# Altium PCB Liquid Tremolo.PcbDoc
Units mm, origin at the board's own origin, x right, y up, seen from the top; angles counter-clockwise.
Board outline 52.07 x 102.87 mm, 2 copper layers (Top Layer, Bottom Layer); 58 components, 47 nets, 186 pads, 60 vias.
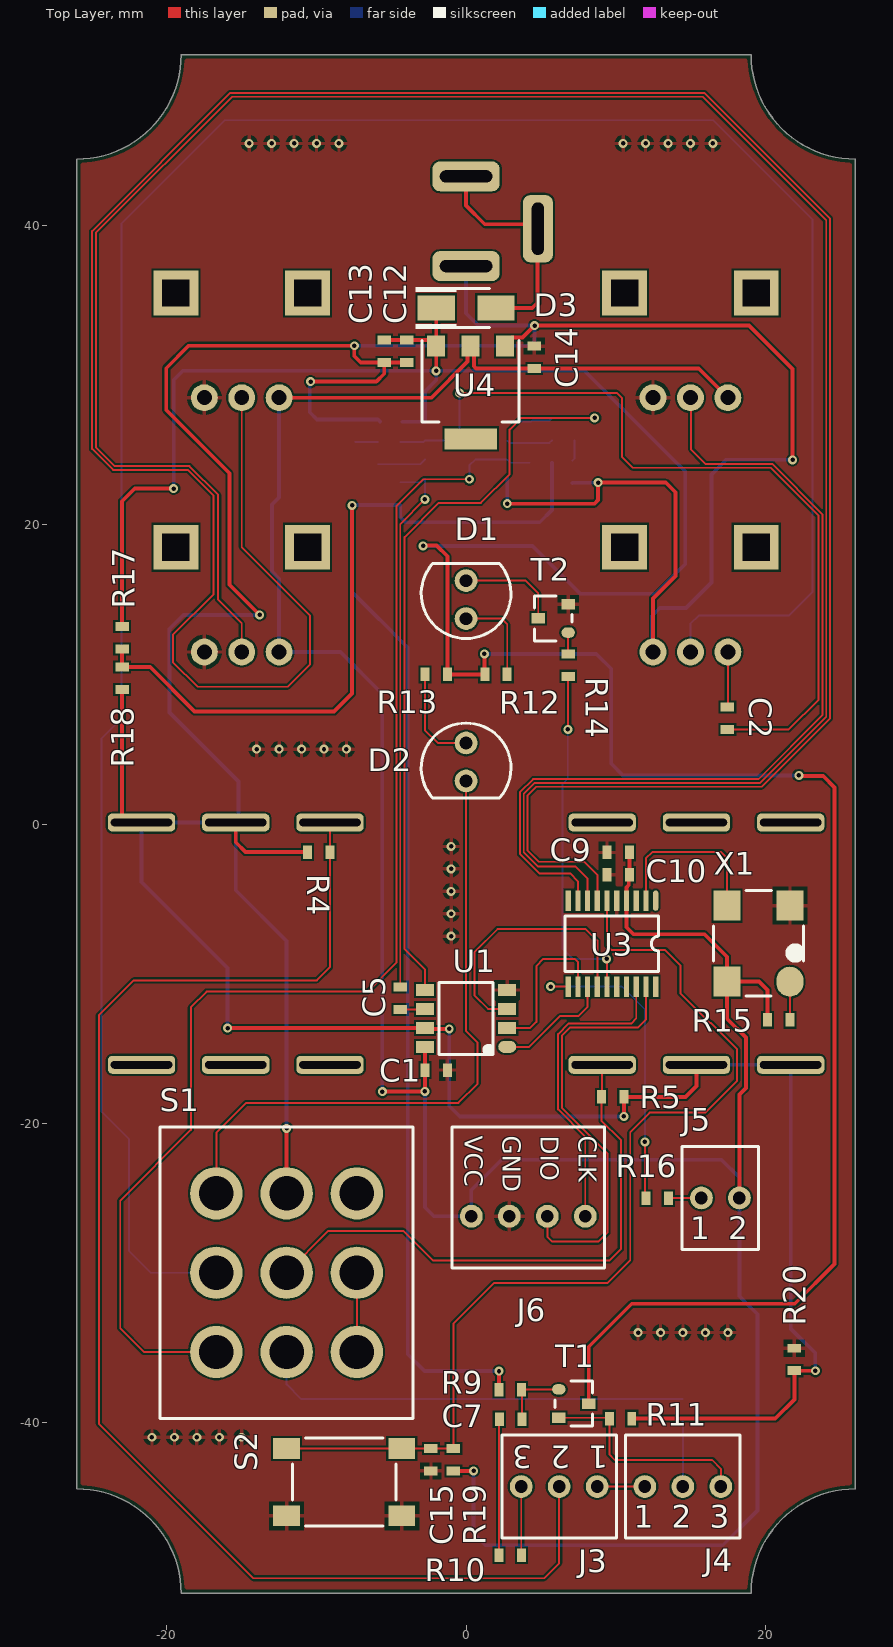
[diagram p0: Top Layer view]
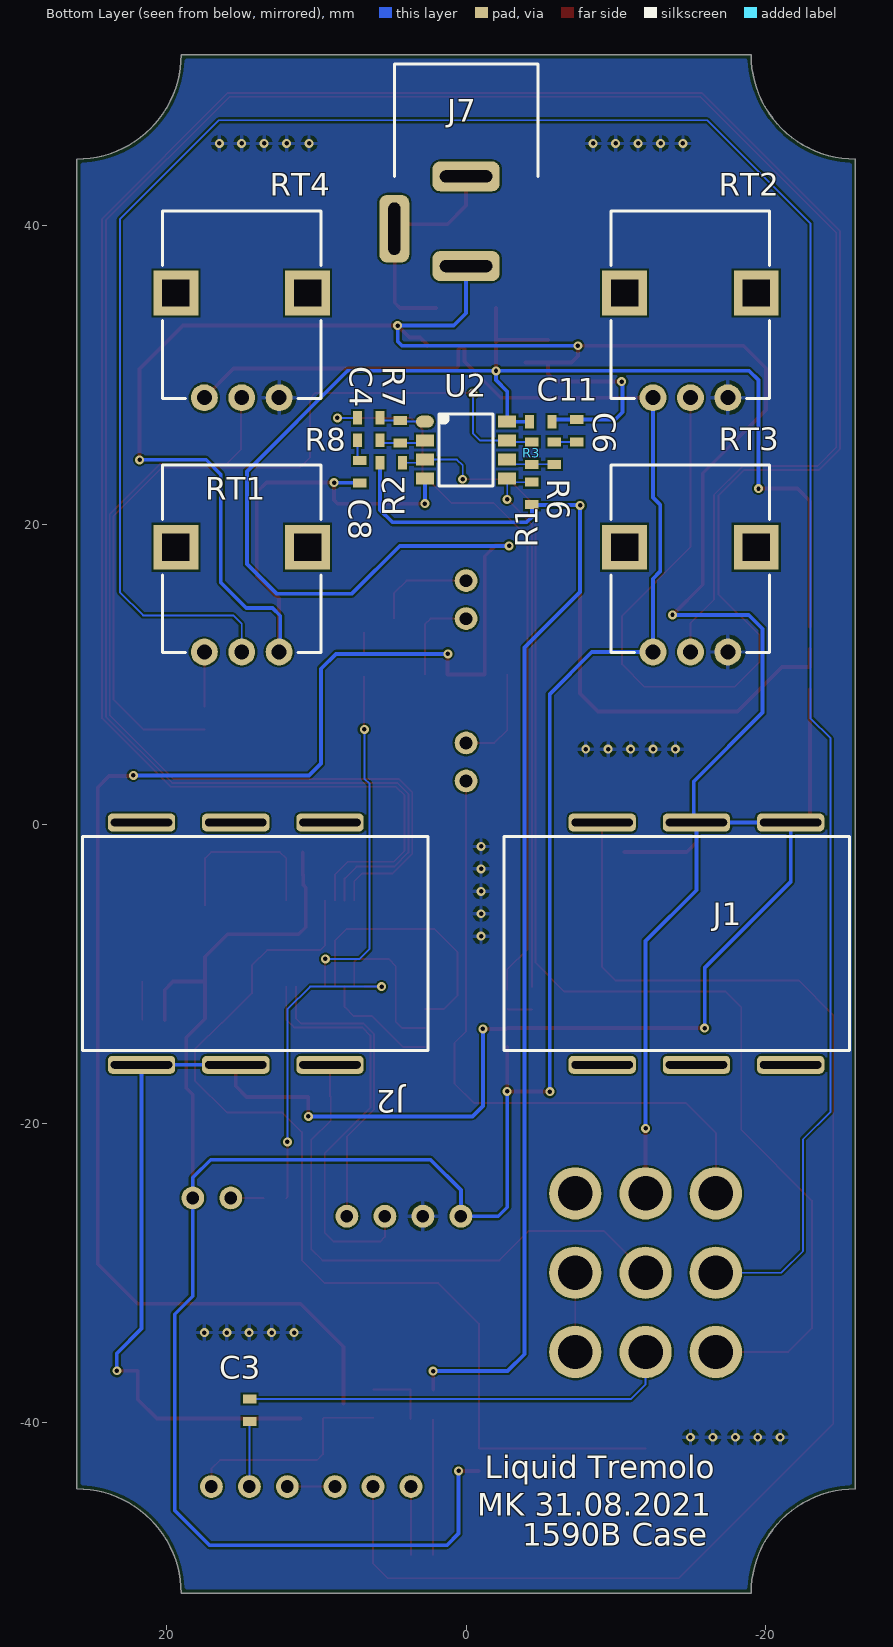
[diagram p1: Bottom Layer view, seen from below]
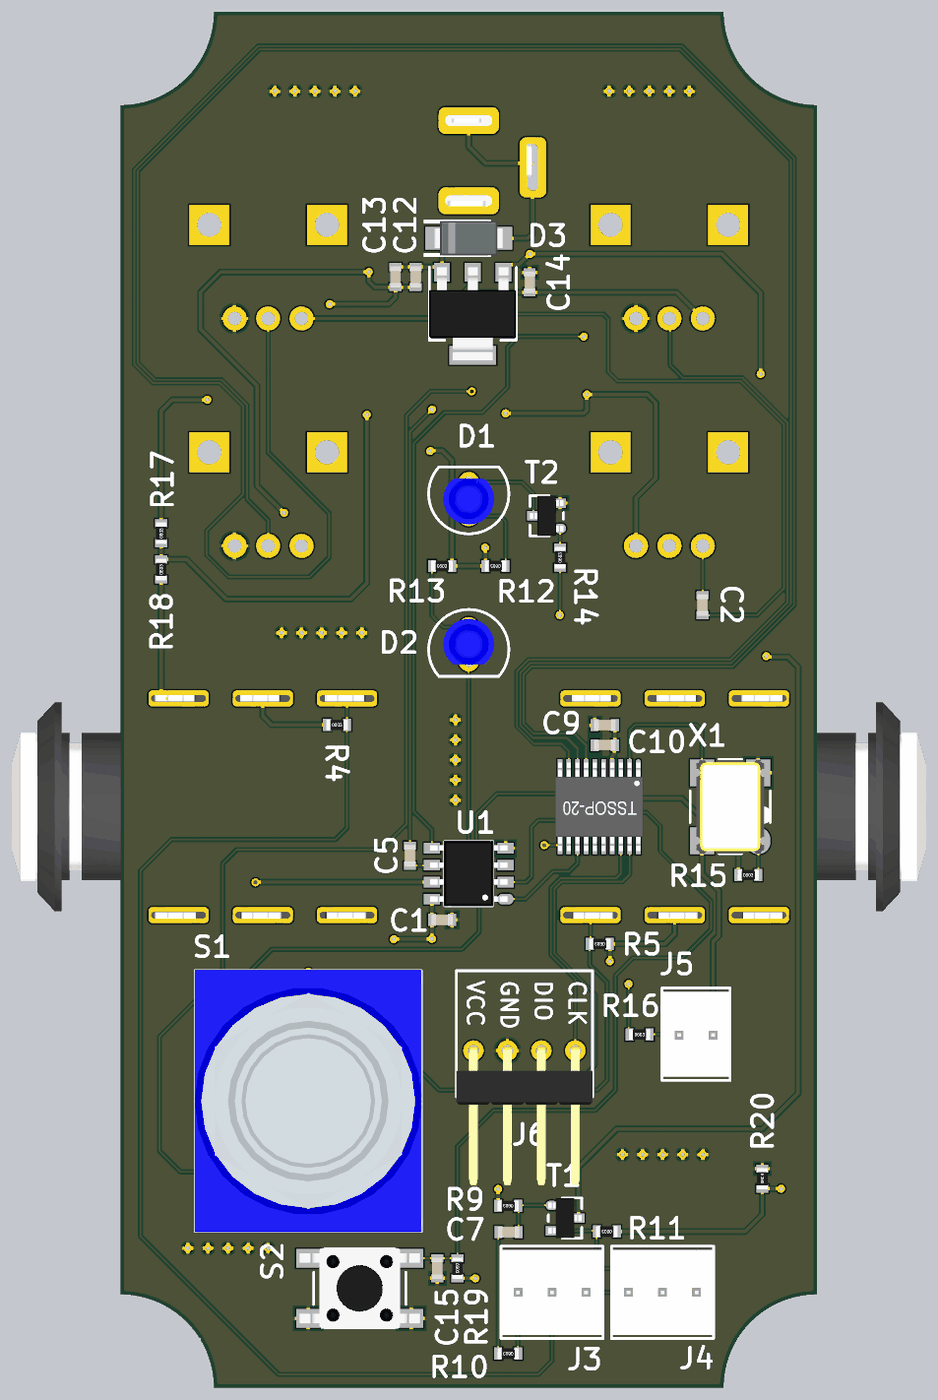
[diagram p2: 3D render of the assembled board from above, using the file's embedded part models]
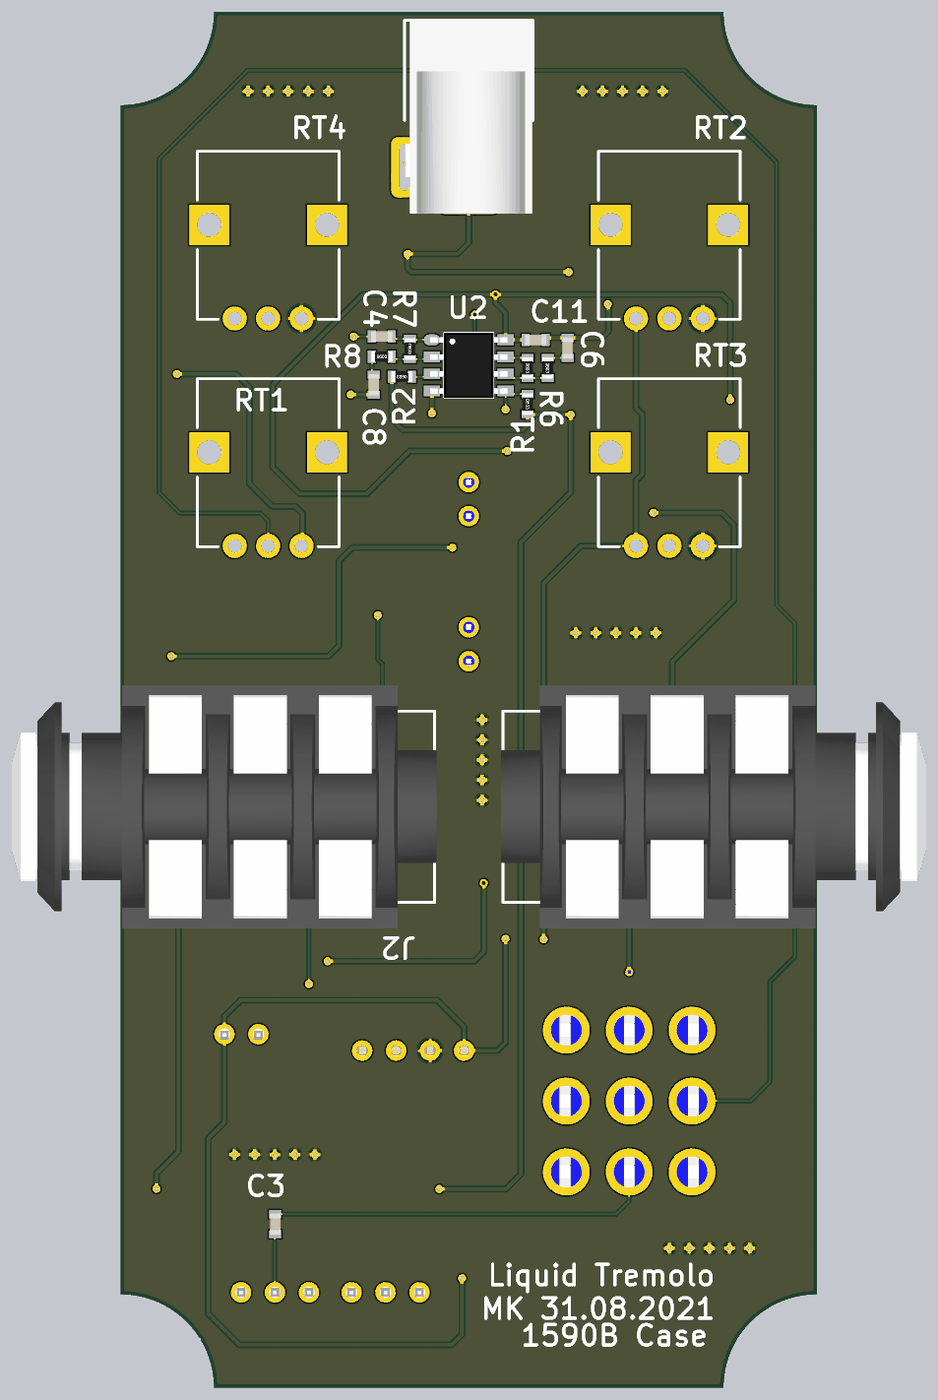
[diagram p3: 3D render of the assembled board from below, using the file's embedded part models]

## Layer stack, top to bottom
Top Solder: solder mask 0.0102, Solder Resist, Dk 3.5
Top Layer: signal copper 0.0356
Dielectric 1: dielectric 0.32, FR-4, Dk 4.8
Bottom Layer: signal copper 0.0356
Bottom Solder: solder mask 0.0102, Solder Resist, Dk 3.5

## Board outline
-26.035,-44.45 -26.035,44.45 ccw(c-26.035,51.435) -19.05,51.435 19.05,51.435 ccw(c26.035,51.435) 26.035,44.45 26.035,-44.45 ccw(c26.035,-51.435) 19.05,-51.435 -19.05,-51.435 ccw(c-26.035,-51.435)

## Design rules (kind name [scope] priority, off if disabled: settings)
BoardOutlineClearance [All] p1: gap=0.254 ignorepadtopadclearanceinfootprint=FALSE
Clearance [All] p1: gap=0.127 ignorepadtopadclearanceinfootprint=FALSE except(0.2: Arc-SMDPad Track-SMDPad; 0.254: Arc-Via Track-Via Via-Via; 0.33: Arc-THPad Track-THPad; 0.5: THPad-THPad)
Height [All] p1: minheight=0 maxheight=50 prefheight=12.7
HoleSize [All] p1: absolutevalues=TRUE maxlimit=6.3 minlimit=0.3 maxpercent=80.000 minpercent=20.000
HoleToHoleClearance [All] p1: gap=0.5 allowstackedmicrovias=TRUE
MinimumSolderMaskSliver [All] p1: minsoldermaskwidth=0.05
PolygonConnect [All] p1: connectstyle=Relief reliefconductorwidth=0.254 reliefentries=4 polygonreliefangle="90 Angle" airgapwidth=0.254
RoutingVias [All] p1: holewidth=0.3 width=0.6 viastyle="Through Hole" minholewidth=0.3 minwidth=0.6 maxholewidth=0.3 maxwidth=0.6
SilkToSilkClearance [All] p1: silktosilkclearance=0.1
SilkToSolderMaskClearance [IsPad] p1: minsilkscreentomaskgap=0.1 clearancetoexposedcopper=TRUE
SolderMaskExpansion [All] p1: expansion=0.102 istentingtop=FALSE
Width Power [InNet('+3.3V') or InNet('+4.5V') or InNet('+9V') or InNet('GND') or InNet('DGND') or InNet('NetD3_1')] p1: maxlimit=0.254 minlimit=0.254 preferedwidth=0.254
Width [All] p2: maxlimit=0.127 minlimit=0.127 preferedwidth=0.127
24 further rules are at their usual default settings.

## Components (designator, comment, footprint, x,y, rotation, side; value= is the part's Value field where it differs from the comment)
C1 "1μ 16V" "CAPACITOR 0603" -2,-16.45 r0 top
C2 "470n 16V" "CAPACITOR 0603" 17.475,7.075 r90 top
C3 "470n 16V" "CAPACITOR 0603" 14.475,-39.2 r90 bottom
C4 "470n 16V" "CAPACITOR 0603" 6.5,27.15 r0 bottom
C5 "470n 16V" "CAPACITOR 0603" -4.4,-11.65 r90 top
C6 "1μ 16V" "CAPACITOR 0603" -7.4,26.3 r270 bottom
C7 "47n 16V" "CAPACITOR 0603" 2.975,-39.8 r0 top
C8 "1μ 16V" "CAPACITOR 0603" 7.1,23.55 r90 bottom
C9 "470n 16V" "CAPACITOR 0603" 10.175,-1.9 r0 top
C10 "1μ 16V" "CAPACITOR 0603" 10.175,-3.4 r0 top
C11 "22μ 10V" "CAPACITOR 0603" -5,26.9 r0 bottom
C12 "22μ 10V" "CAPACITOR 0603" -3.975,31.6 r90 top
C13 "22μ 10V" "CAPACITOR 0603" -5.475,31.6 r90 top
C14 "22μ 10V" "CAPACITOR 0603" 4.55,31.2 r270 top
C15 "470n 16V" "CAPACITOR 0603" -2.35,-42.5 r90 top
D1 "Blue 3mm" "LED 3MM BLUE" 0,15 r270 top
D2 "Red 3mm" "LED 3MM BLUE" 0,4.15 r90 top locked
D3 "SS24A" SS24A 0,34.5 r180 top
J1 "PJ-609K" "HOOYA PJ-609K" -15.4,-8 r0 bottom locked
J2 "PJ-609K" "HOOYA PJ-609K" 15.4,-8 r180 bottom locked
J3 "HX25411-3A" HX25411-3A 6.225,-44.3 r180 top
J4 "HX25411-3A" HX25411-3A 14.49,-44.3 r0 top
J5 "HX25411-2A" HX25411-2A 17,-25 r0 top
J6 "W-2510R04P-0000" W-2510R04P-0000 4.16,-26.225 r180 top
J7 "DC-005 2.0" "DC-005 2.0" 0,50.8 r270 bottom
R1 "470k" "RESISTOR 0603" -4.4,22.1 r270 bottom
R2 "470k" "RESISTOR 0603" 5,24.15 r0 bottom
R3 "10k" "RESISTOR 0603" -4.4,24.8 r270 bottom
R4 "1M" "RESISTOR 0603" -9.85,-1.875 r0 top
R5 "1M" "RESISTOR 0603" 9.8,-18.25 r180 top
R6 "10k" "RESISTOR 0603" -5.9,24.8 r270 bottom
R7 "10k" "RESISTOR 0603" 4.4,26.225 r270 bottom
R8 "10k" "RESISTOR 0603" 6.5,25.65 r180 bottom
R9 "470k" "RESISTOR 0603" 2.95,-37.825 r180 top
R10 "1k" "RESISTOR 0603" 2.95,-48.875 r180 top
R11 "10k" "RESISTOR 0603" 10.325,-39.75 r180 top
R12 "100Ω" "RESISTOR 0603" 2,10 r180 top
R13 "1k" "RESISTOR 0603" -2,10 r0 top
R14 "1k" "RESISTOR 0603" 6.825,10.625 r90 top
R15 "10k" "RESISTOR 0603" 20.9,-13.1 r0 top
R16 "10k" "RESISTOR 0603" 12.775,-25.025 r0 top
R17 "10k" "RESISTOR 0603" -23,12.45 r90 top
R18 "10k" "RESISTOR 0603" -23,9.74 r90 top
R19 "10k" "RESISTOR 0603" -0.85,-42.5 r270 top
R20 "0Ω" "RESISTOR 0603" 21.95,-35.8 r90 top
RT1 "10k" RK09D1130C2P 15,18.5 r180 bottom locked
RT2 "10k" RK09D1130C2P -15,35.5 r180 bottom locked
RT3 "10k" RK09D1130C2P -15,18.5 r180 bottom locked
RT4 "10k" RK09D1130C2P 15,35.5 r180 bottom locked
S1 "3PDT" 3PDT -12,-30 r90 top locked
S2 "K2-1102SP-C4SC-04" K2-1102SP-C4SC-04 -8.15,-44 r0 top
T1 "2SC1815" 2SC1815 7.2,-38.75 r270 top
T2 "2SC1815" 2SC1815 5.825,13.75 r90 top
U1 "MCP41010T-I/SN" MCP41010 0,-13 r180 top
U2 "JRC4558D" JRC4558 0,25 r180 bottom
U3 "STM32G030F6P6TR" STM32G030F6P6TR 9.75,-8 r180 top
U4 "SC1117-3.3V" SC1117-3.3V 0.3,28.85 r180 top
X1 "S7D32.768KB20F30T" S7D32.768KB20F30T 19.55,-8 r90 top

## Footprints (in the part's own frame and the unit in brackets; to place one, negate y for a bottom-side part, rotate by r counter-clockwise, add the part's x,y. Pads: shape width x height; smd on the part's side, far side on the other; paste and mask are expansions set on the pad)
2SC1815 [mm]
  oval 0.7x0.9 smd: 1(-0.95,-1)
  rect 0.7x0.9 smd: 2(0.95,-1) 3(0,1)
  silkscreen extent -1.5,-1.25 1.5,1.25, body extent -1.5,-1.25 1.5,1.25, height 1.1
3PDT [mm]
  round 3.5 hole 2.3: 1(-5.3,4.7) 2(-5.3,0) 3(-5.3,-4.7) 4(0,4.7) 5(0,0) 6(0,-4.7) 7(5.3,4.7) 8(5.3,0) 9(5.3,-4.7)
  silkscreen extent -9.75,-8.45 9.75,8.45, body extent -9.8,-8.5 9.8,8.5, height 39.5
"CAPACITOR 0603" [mm]
  rect 0.6x0.9 smd: 1(-0.75,0) 2(0.75,0)
  body extent -0.8,-0.4 0.8,0.4, height 0.8
"DC-005 2.0" [mm]
  rrect50% 4.5x2 hole 0.8 slot 3.5 at 0 deg: 2(11,-4.8)
  rrect50% 2x4.5 hole 0.8 slot 3.5 at 90 deg: 3(7.5,0) 4(13.5,0)
  silkscreen extent 0,-4.8 7.5,4.8, body extent 0,-4.74 14.48,4.74, height 11.18
"HOOYA PJ-609K" [mm]
  rrect50% 4.5x1.2 hole 0.5 slot 4.1 at 0 deg: 2(-6.3,-8.1) 3(-6.3,8.1) 4(0,-8.1) 5(0,8.1) 6(6.3,-8.1) 7(6.3,8.1)
  silkscreen extent -10.25,-7.15 12.85,7.15, body extent -18.79,-9.1 13,9.1, height 17.8
HX25411-2A [mil]
  round 60 hole 33.46: 1(-50,0) 2(50,0)
  silkscreen extent -100,-136 100,136, body extent -100,-125 100,125, height 453
HX25411-3A [mil]
  round 60 hole 33.46: 1(-100,0) 2(0,0) 3(100,0)
  silkscreen extent -150,-136 150,136, body extent -150,-125 150,125, height 453
JRC4558 [mm]
  oval 1.2x0.8 smd: 1(-2.75,1.905)
  rect 1.2x0.8 smd: 2(-2.75,0.635) 3(-2.75,-0.635) 4(-2.75,-1.905) 5(2.75,-1.905) 6(2.75,-0.635) 7(2.75,0.635) 8(2.75,1.905)
  silkscreen extent -1.8,-2.4 1.8,2.4, body extent -2.89,-2.45 2.89,2.45, height 1.45
K2-1102SP-C4SC-04 [mm]
  rect 1.8x1.4 smd: 1(-3.85,-2.25) 2(3.85,-2.25) 3(3.85,2.25) 4(-3.85,2.25)
  silkscreen extent -3.45,-2.95 3.45,2.95, body extent -4.5,-3 4.5,3, height 5
"LED 3MM BLUE" [mil]
  round 60 hole 33.46: 1(-50,0) 2(50,0)
  silkscreen extent -94,-118 102,118, body extent -60,-75 75,75, height 379
MCP41010 [mm]
  oval 1.2x0.8 smd: 1(-2.75,1.905)
  rect 1.2x0.8 smd: 2(-2.75,0.635) 3(-2.75,-0.635) 4(-2.75,-1.905) 5(2.75,-1.905) 6(2.75,-0.635) 7(2.75,0.635) 8(2.75,1.905)
  silkscreen extent -1.8,-2.4 1.8,2.4, body extent -2.89,-2.45 2.89,2.45, height 1.45
"RESISTOR 0603" [mm]
  rect 0.6x0.9 smd: 1(-0.75,0) 2(0.75,0)
  body extent -0.8,-0.4 0.8,0.4, height 0.45
RK09D1130C2P [mm]
  round 1.8 hole 1: 1(-2.5,-7) 2(0,-7) 3(2.5,-7)
  rect 3x3 hole 1.8 square: ""(-4.4,0) ""(4.4,0)
  silkscreen extent -5.3,-7.05 5.3,5.5, body extent -5.3,-7.05 5.3,5.5, height 26.8
S7D32.768KB20F30T [mm]
  oval 2x1.8 smd: 1(-2.54,-2.1)
  rect 2x1.8 smd: 2(2.54,-2.1) 3(2.54,2.1) 4(-2.54,2.1)
  silkscreen extent -3.5,-3 3.54,3, body extent -3.5,-2.54 3.5,2.54, height 1.8
SC1117-3.3V [mm]
  rect 1.2x1.4 smd: 1(-2.3,-3.1) 2(0,-3.1) 3(2.3,-3.1)
  rect 3.5x1.4 smd: ""(0,3.1)
  silkscreen extent -3.25,-3.47 3.25,1.97, body extent -3.25,-3.48 3.25,3.48, height 1.7
SS24A [mm]
  rect 2.5x1.7 smd: 1(-2,0) 2(2,0)
  silkscreen extent -1.58,-1.4 3.37,1.4, body extent -2.6,-1.3 2.6,1.3, height 2.4
STM32G030F6P6TR [mm]
  oval 0.35x1.35 smd: 1(-2.925,-2.875)
  rect 0.35x1.35 smd: 2(-2.275,-2.875) 3(-1.625,-2.875) 4(-0.975,-2.875) 5(-0.325,-2.875) 6(0.325,-2.875) 7(0.975,-2.875) 8(1.625,-2.875) 9(2.275,-2.875) 10(2.925,-2.875) 11(2.925,2.875) 12(2.275,2.875) 13(1.625,2.875) 14(0.975,2.875) 15(0.325,2.875) 16(-0.325,2.875) 17(-0.975,2.875) 18(-1.625,2.875) 19(-2.275,2.875) 20(-2.925,2.875)
  silkscreen extent -3.13,-1.85 3.13,1.85, body extent -3.3,-3.3 3.3,3.3, height 1.2
W-2510R04P-0000 [mil]
  round 60 hole 33.46: 1(-150,0) 2(-50,0) 3(50,0) 4(150,0)
  silkscreen extent -200,-235 200,136, body extent -200,-12 200,396, height 120

## Part data
C1 C6 C8 C10: library part "Capacitor 1μF 0603 ±10% 16V", "X7R ±10% 1uF 16V 0603 Multilayer Ceramic Capacitors MLCC - SMD/SMT ROHS", LCSC Part #=C106248, Mfr. Part #=CC0603KRX7R7BB105, Package=0603, ComponentLink1Description=Datasheet, ComponentLink1URL=https://datasheet.lcsc.com/lcsc/1811082135_YAGEO-CC0603KRX7R7BB473_C115058.pdf, Type=SMD
C2 C3 C4 C5 C9 C15: library part "Capacitor 470nF 0603 ±10% 16V", "X7R ±10% 470nF 16V 0603 Multilayer Ceramic Capacitors MLCC - SMD/SMT ROHS", LCSC Part #=C106851, Mfr. Part #=CC0603KRX7R7BB474, Package=0603, ComponentLink1Description=Datasheet, ComponentLink1URL=https://datasheet.lcsc.com/lcsc/1811082135_YAGEO-CC0603KRX7R7BB473_C115058.pdf, Type=SMD
C7: library part "Capacitor 47nF 0603 ±10% 16V", "X7R ±10% 47nF 16V 0603 Multilayer Ceramic Capacitors MLCC - SMD/SMT ROHS", LCSC Part #=C115058, Mfr. Part #=CC0603KRX7R7BB473, Package=0603, ComponentLink1Description=Datasheet, ComponentLink1URL=https://datasheet.lcsc.com/lcsc/1811082135_YAGEO-CC0603KRX7R7BB473_C115058.pdf, Type=SMD
C11 C12 C13 C14: library part "Capacitor 22μF 0603 ±10% 16V", "X5R ±20% 10V 22uF 0603 Multilayer Ceramic Capacitors MLCC - SMD/SMT ROHS", LCSC Part #=C60077, Mfr. Part #=0603X226M100NT, Package=0603, ComponentLink1Description=Datasheet, ComponentLink1URL=https://datasheet.lcsc.com/lcsc/1811151152_FH-Guangdong-Fenghua-Advanced-Tech-0603X226M100NT_C60077.pdf, Type=SMD
D1: library part "Diode LED Blue 3mm THT", "Blue 460nm~470nm 2.7V~3.6V Through Hole Light Emitting Diodes (LED) ROHS", LCSC Part #=C330760, Mfr. Part #=TJ-L3FYTGCBMCGSFLC6B-A5, Package="Through Hole", ComponentLink1Description=Datasheet, ComponentLink1URL=https://datasheet.lcsc.com/lcsc/2006301911_TOGIALED-TJ-L3FYTGCBMCGSFLC6B-A5_C330760.pdf, Type=THT
D2: library part "Diode LED Red 3mm THT", "Red 620nm~630nm 1.8V~2.6V Through Hole Light Emitting Diodes (LED) ROHS", LCSC Part #=C331039, Mfr. Part #=TJ-L4FYTGCRMFCSFLC2R-A5, Package="Through Hole", ComponentLink1Description=Datasheet, ComponentLink1URL=https://datasheet.lcsc.com/lcsc/2006301911_TOGIALED-TJ-L3FYTGCBMCGSFLC6B-A5_C330760.pdf, Type=THT
D3: library part "Diode 40V 2A 500mV SS24A", "40V 2A 500mV @ 2A SMA(DO-214AC) Schottky Barrier Diodes (SBD) ROHS", LCSC Part #=C181203, Package=SMA(DO-214AC), ComponentLink1Description=Datasheet, ComponentLink1URL=https://datasheet.lcsc.com/lcsc/1811151533_Guangdong-Hottech-SS24A_C181203.pdf, Mfr. Part #=SS24A, Type=SMD
J1 J2: library part "Mechanical Connector JACK 6.35mm PJ-609K", "6.35mm Plug-in headphone holder Horizontal 6 Female - Audio & Video Connectors ROHS", LCSC Part #=C309276, Package=-, ComponentLink1Description=Datasheet, ComponentLink1URL=https://datasheet.lcsc.com/lcsc/1912111437_HOOYA-PJ-609K_C309276.pdf, Mfr. Part #=PJ-609K, Type=THT
J3 J4: library part "Mechanical Connector 3P 2.54mm THT HX25411-3A", "3 Header CH 0.100\"(2.54mm) Male Pin Through Hole Wire To Board / Wire To Wire Connector ROHS", LCSC Part #=C190647, Package="Through Hole", ComponentLink1Description=Datasheet, ComponentLink1URL=https://datasheet.lcsc.com/lcsc/1811151531_HX-Zhejiang-Yueqing-Hongxing-Elec-HX25411-3A_C190647.pdf, Mfr. Part #=HX25411-3A, Type=THT
J5: library part "Mechanical Connector 2P 2.54mm THT HX25411-2A", "LCSC Part # C181912 / Package P=2.54mm / Manufacturer HX(Zhejiang Yueqing Hongxing Elec)", LCSC Part #=C181912, Package=P=2.54mm, ComponentLink1Description=Datasheet, ComponentLink1URL=https://datasheet.lcsc.com/lcsc/1810161736_HX-Zhejiang-Yueqing-Hongxing-Elec-HX25411-2A_C181912.pdf, Mfr. Part #=HX25411-2A, Type=THT
J6: library part "Mechanical Connector 4P 2.54mm THT Right Angle W-2510R04P-0000", "4 Header MX2.54 0.100\"(2.54mm) Male Pin Through Hole,P=2.54mm Wire To Board / Wire To Wire Connector ROHS", LCSC Part #=C169027, Package="Through Hole", ComponentLink1Description=Datasheet, ComponentLink1URL=https://datasheet.lcsc.com/lcsc/1810222331_Ckmtw-Shenzhen-Cankemeng-W-2510R04P-0000_C169027.pdf, Mfr. Part #=W-2510R04P-0000, Type=THT
J7: library part "Mechanical DC Jack DC-005 2.0", "Through Hole AC/DC Power Plugs & Receptacles ROHS", LCSC Part #=C16214, Package="Through Hole", ComponentLink1Description=Datasheet, ComponentLink1URL=https://datasheet.lcsc.com/lcsc/1811051112_BOOMELE-Boom-Precision-Elec-DC-005-2-0_C16214.pdf, Mfr. Part #="DC-005 2.0", Type=THT
R1 R2 R9: library part "Resistor 470kΩ 0603 ±1% 0.1W", "±1% 470kΩ ±100ppm/℃ 0.1W 0603 Chip Resistor - Surface Mount ROHS", LCSC Part #=C23178, Mfr. Part #=0603WAF4703T5E, Package=0603, ComponentLink1Description=Datasheet, ComponentLink1URL=https://datasheet.lcsc.com/lcsc/1811021221_UNI-ROYAL-Uniroyal-Elec-0603WAF4703T5E_C23178.pdf, Type=SMD
R3 R6 R7 R8 R11 R15 R16 R17 R18 R19: library part "Resistor 10kΩ 0603 ±1% 0.1W", "±1% ±100ppm/℃ 10kΩ 0.1W 0603 Chip Resistor - Surface Mount ROHS", LCSC Part #=C25804, Mfr. Part #=0603WAF1002T5E, Package=0603, ComponentLink1Description=Datasheet, ComponentLink1URL=https://datasheet.lcsc.com/lcsc/1811021221_UNI-ROYAL-Uniroyal-Elec-0603WAF4703T5E_C23178.pdf, Type=SMD
R4 R5: library part "Resistor 1MΩ 0603 ±1% 0.1W", "1MΩ ±1% 0.1W 0603 Chip Resistor - Surface Mount ROHS", LCSC Part #=C269705, Mfr. Part #=RMC06031M1%N, Package=0603, ComponentLink1Description=Datasheet, ComponentLink1URL=https://datasheet.lcsc.com/lcsc/1811101311_TyoHM-RMC06031M1-N_C269705.pdf, Type=SMD
R10 R13 R14: library part "Resistor 1kΩ 0603 ±1% 0.1W", "±1% ±100ppm/℃ 1kΩ 0.1W 0603 Chip Resistor - Surface Mount ROHS", LCSC Part #=C22548, Mfr. Part #=RC0603FR-071KL, Package=0603, ComponentLink1Description=Datasheet, ComponentLink1URL=https://datasheet.lcsc.com/lcsc/1810182020_YAGEO-RC0603FR-071KL_C22548.pdf, Type=SMD
R12: library part "Resistor 100Ω 0603 ±1% 0.1W", "±1% ±200ppm/℃ 100Ω 0.1W 0603 Chip Resistor - Surface Mount ROHS", LCSC Part #=C22775, Mfr. Part #=0603WAF1000T5E, Package=0603, ComponentLink1Description=Datasheet, ComponentLink1URL=https://datasheet.lcsc.com/lcsc/1811021221_UNI-ROYAL-Uniroyal-Elec-0603WAF4703T5E_C23178.pdf, Type=SMD
R20: library part "Resistor 0Ω 0603 ±1% 0.1W", "75V -55℃~+155℃ ±1% Thick Film Resistors 100mW 0Ω 0603 Chip Resistor - Surface Mount ROHS", LCSC Part #=C100044, Mfr. Part #=RC0603FR-070RL, Package=0603, ComponentLink1Description=Datasheet, ComponentLink1URL=https://datasheet.lcsc.com/lcsc/1810182020_YAGEO-RC0603FR-071KL_C22548.pdf, Type=SMD
RT1 RT2 RT3 RT4: library part "Potentiometer 10kΩ plugin ±20% RK09D1130C2P", "±20% 10kΩ Plugin Variable Resistors/Potentiometers ROHS", LCSC Part #=C361173, Mfr. Part #=RK09D1130C2P, Package=Plugin, ComponentLink1Description=Datasheet, ComponentLink1URL=https://datasheet.lcsc.com/lcsc/1912111437_ALPSALPINE-RK09D1130C2P_C361173.pdf, Type=THT
S1: library part "Mechanical 3PDT Footswitch", "Top Actuated 50mA @ 12VDC Round Button SPST 6*6mm Tactile Switches ROHS", ComponentLink1Description=Datasheet, ComponentLink1URL=https://effectpedalkits.com/wp-content/uploads/2018/02/3pdt-latching-footswitch-dimensions.jpg
S2: library part "Mechanical Tactile Switch 6x6mm SMD", "Top Actuated 50mA @ 12VDC Round Button SPST 6*6mm Tactile Switches ROHS", LCSC Part #=C127509, Package=6*6mm, ComponentLink1Description=Datasheet, ComponentLink1URL=https://datasheet.lcsc.com/lcsc/1811082113_Korean-Hroparts-Elec-K2-1102SP-C4SC-04_C127509.pdf, Mfr. Part #=K2-1102SP-C4SC-04, Type=SMD
T1 T2: library part "Transistor 2SC1815 50V 0.2W 0.15A NPN SOT-23", "50V 0.2W 0.15A NPN SOT-23(SOT-23-3) Bipolar Transistors - BJT ROHS", LCSC Part #=C181171, Package=SOT-23, ComponentLink1Description=Datasheet, ComponentLink1URL=https://datasheet.lcsc.com/lcsc/1810091731_Guangdong-Hottech-2SC1815_C181171.pdf, Mfr. Part #=2SC1815, Type=SMD
U1: library part "IC Digital Potentiometer SOIC-8 MCP41010T-I/SN", "SOIC-8 Digital Potentiometers ROHS", LCSC Part #=C136395, Package=SOIC-8, ComponentLink1Description=Datasheet, ComponentLink1URL=https://datasheet.lcsc.com/lcsc/1806121747_Microchip-Tech-MCP41010T-I-SN_C136395.pdf, Mfr. Part #=MCP41010T-I/SN, Type=SMD
U2: library part "IC OP-AMP JRC4558D SOP-8", "SOP-8 Operational Amplifier ROHS", LCSC Part #=C443686, Package=SOP-8, ComponentLink1Description=Datasheet, ComponentLink1URL=https://datasheet.lcsc.com/lcsc/1912111437_UMW-Youtai-Semiconductor-Co---Ltd--JRC4558D_C443686.pdf, Mfr. Part #=JRC4558D, Type=SMD
U3: library part "IC MCU STM32G030F6P6TR TSSOP-20", "TSSOP-20 ST Microelectronics ROHS", LCSC Part #=C529330, Package=SOIC-8, ComponentLink1Description=Datasheet, ComponentLink1URL=https://datasheet.lcsc.com/lcsc/2005192134_STMicroelectronics-STM32G030F6P6TR_C529330.pdf, Mfr. Part #=STM32G030F6P6TR, Type=TSSOP-20
U4: library part "IC LDO 3.3V Fixed 700mA SOT-223 SC1117-3.3V", "12V 1.5V @ 700mA Fixed 3.3V SOT-223 Linear Voltage Regulators (LDO) ROHS", LCSC Part #=C173386, Package=SOT-223, ComponentLink1Description=Datasheet, ComponentLink1URL=https://datasheet.lcsc.com/lcsc/2105181504_Shenzhen-Fuman-Elec-SC1117-3-3V_C173386.pdf, Mfr. Part #=SC1117-3.3V, Type=SMD
X1: library part "Crystal Oscillator 32.768kHz S7D32.768KB20F30T", "3.3V 32.768KHz ±20ppm SMD7050-4P Oscillators ROHS", LCSC Part #=C387070, Package=SMD7050-4P, ComponentLink1Description=Datasheet, ComponentLink1URL=https://datasheet.lcsc.com/lcsc/1912111437_Shenzhen-SCTF-Elec-S7D32-768KB20F30T_C387070.pdf, Mfr. Part #=S7D32.768KB20F30T, Type=SMD

## Via types
v1: diameter 0.6, hole 0.3, Top Layer to Bottom Layer, 60 vias

## Nets (pads, with @x,y where several pads share a name; then routed paths per layer and width w, separated by ;. In a path a pad name is that pad's centre, name@x,y a point inside that pad or via, vN(x,y) a via of type N, cw(c..) or ccw(c..) an arc to the next point about the centre after c; other vN are vias at no path point)
+3.3V: C1.1 C9.2 C10.2 C14.2 J5.2 J6.4 R15.1 R19.2 RT2.1 RT3.1 RT4.1 U1.8 U3.4 U4.2 X1.4 | length 206.9
  Top Layer w0.254: RT2.1 -2.316,28.5 0.1,30.916 0.1,31.75 U4.2 0.525,31.725 0.525,30.599 0.674,30.45 C14.2 15.55,30.45 RT4.1 ; v1(-5.6,-17.9) -5.587,-17.888 -2.762,-17.888 v1(-2.75,-17.875) C1.1 U1.8 ; R19.2 v1(0.5,-43.25) ; C9.2 C10.2 10.88,-3.445 10.88,-4.082 10.725,-4.237 10.725,-6.9 11.2,-7.375 15.95,-7.375 17.45,-8.875 X1.4 ; J5.2 18.27,-18.077 18.707,-17.64 18.707,-14.282 17.45,-13.025 X1.4 ; R15.1 20.15,-11.1 19.59,-10.54 X1.4
  Bottom Layer w0.254: RT2.1 -12.5,21.825 -12.975,21.35 -12.975,16.872 -12.5,16.397 RT3.1 -8.4,11.5 -5.6,8.7 v1(-5.6,-17.9) ; v1(-2.75,-17.875) -2.75,-25.625 -2.15,-26.225 J6.4 0.35,-24.475 2.375,-22.45 17.075,-22.45 18.27,-23.645 J5.2 18.27,-31.57 19.475,-32.775 19.475,-45.9 17.159,-48.216 1.286,-48.216 0.5,-47.431 v1(0.5,-43.25)
+4.5V: R1.2 R2.2 R9.2 R17.1 R18.2 | length 114.9
  Top Layer w0.254: R17.1 R18.2 -21.115,10.49 -18.15,7.525 -8.825,7.525 -7.625,8.725 v1(-7.625,21.3) ; R9.2 v1(2.2,-36.575)
  Bottom Layer w0.254: v1(2.2,-36.575) -2.775,-36.575 -3.9,-35.45 -3.9,11.791 -7.625,15.516 v1(-7.625,21.3) -7.6,21.325 -4.425,21.325 R1.2 -4.4,20.525 -4.05,20.175 4.925,20.175 5.75,21 R2.2
+9V: C11.2 C12.2 C13.2 D3.2 R12.2 R13.2 R17.2 T1.3 U2.8 U4.3 | length 194.1
  Top Layer w0.254: R17.2 -23,21.575 -22.15,22.425 v1(-19.55,22.425) ; C13.2 C12.2 -2.125,32.35 -2,32.225 D3.2 ; v1(-2.879,18.594) -2.848,18.625 -1.975,18.625 -1.25,17.9 R13.2 R12.2 1.237,10.013 1.237,11.362 v1(1.225,11.375) ; v1(-2,30.3) U4.3 ; T1.3 8.2,-34.95 11.075,-32.075 21.975,-32.075 24.625,-29.425 24.625,2.45 23.875,3.2 22.3,3.2 v1(22.25,3.25)
  Bottom Layer w0.254: v1(-19.55,22.425) -19.55,29.675 -18.925,30.3 v1(-2,30.3) ; C11.2 -2.755,26.9 U2.8 -2.75,28.925 -2,29.675 v1(-2,30.3) ; v1(-2.879,18.594) 4.431,18.594 7.625,15.4 12.675,15.4 14.65,17.375 14.65,23.575 7.925,30.3 v1(-2,30.3) ; v1(1.225,11.375) 8.708,11.375 9.7,10.383 9.7,4.05 10.5,3.25 v1(22.25,3.25)
DEPTH: RT3.2 U3.8 | length 156.9
  Top Layer w0.127: RT3.2 -15,13.425 -16.575,15 -16.575,22.009 -18.495,23.929 -23.495,23.929 -24.746,25.18 -24.746,39.529 -15.65,48.625 15.816,48.625 24.079,40.362 24.079,7.17 19.655,2.746 4.587,2.746 3.854,2.013 3.854,-1.895 4.809,-2.85 7.325,-2.85 8.125,-3.65 U3.8
DGND: C1.2 C9.1 C10.1 C14.1 C15.1 J6.3 R20.2 RT2.3 RT3.3 RT4.3 S2.1 S2.2 T2.2 U1.4 U3.5 X1.2
  other v1: -21,-41 -19.5,-41 -18,-41 -16.5,-41 -15,-41 11.5,-34 13,-34 14.5,-34 16,-34 17.5,-34 -1,-7.5 -1,-6 -1,-4.5 -1,-3 -1,-1.5 -14,5 -12.5,5 -11,5 -9.5,5 -8,5 -14.5,45.5 -13,45.5 -11.5,45.5 -10,45.5 -8.5,45.5 10.5,45.5 12,45.5 13.5,45.5 15,45.5 16.5,45.5
GND: C6.1 C8.1 C11.1 C12.1 C13.1 J1.2 J1.4 J2.2 J2.4 J7.4 R4.1 R5.1 R11.1 R18.1 R20.1 RT1.3 S1.8 U1.7 U2.4 U4.1 | length 314.5
  Top Layer w0.254: R18.1 -23,0.56 -22.54,0.1 J1.2 ; v1(-15.95,-13.65) -15.935,-13.635 U1.7 -2.685,-13.7 v1(-1.125,-13.7) ; J1.4 -15.4,-1.225 -14.75,-1.875 R4.1 ; v1(-13.8,13.975) -15.825,16 -15.825,23.45 -20.05,27.675 -20.05,30.475 -18.55,31.975 v1(-7.475,31.975) -7.475,31.283 -7.042,30.85 C13.1 ; S1.8 v1(-12,-20.35) ; v1(-10.4,29.575) -6,29.575 -5.475,30.1 C13.1 ; C12.1 C13.1 ; U4.1 2.6,32.05 3.073,32.523 3.773,32.523 v1(4.575,33.325) 18.925,33.325 21.825,30.425 v1(21.825,24.35) ; v1(2.752,21.415) 8.59,21.415 8.828,21.653 v1(8.828,22.823) 8.83,22.825 13.35,22.825 14,22.175 14,16.575 12.5,15.075 RT1.3 ; v1(10.55,-19.55) R5.1 14.675,-18.25 15.4,-17.525 J2.4 ; R11.1 20.675,-39.75 21.95,-38.475 R20.1 23.345,-36.55 v1(23.35,-36.554)
  Bottom Layer w0.254: v1(-15.95,-13.65) -15.95,-9.625 -21.7,-3.875 J1.2 J1.4 ; v1(-13.8,13.975) -18.9,13.975 -19.825,13.05 -19.825,7.451 -15.225,2.851 -15.225,0.275 J1.4 ; v1(-12,-20.35) -12,-7.825 -15.4,-4.425 J1.4 ; v1(-10.4,29.575) -10.45,29.525 -10.45,27.525 -9.975,27.05 C6.1 -5.9,27.05 C11.1 ; v1(-7.475,31.975) 4.275,31.975 4.575,32.275 v1(4.575,33.325) 0.825,33.325 0,34.15 J7.4@0,37.6 ; v1(-1.125,-13.7) -1.125,-18.85 -0.425,-19.55 v1(10.55,-19.55) ; U2.4 2.75,21.418 v1(2.752,21.415) ; C8.1 7.112,22.812 8.817,22.812 v1(8.828,22.823) ; RT1.3 12.425,11.575 12.425,13.925 12.95,14.45 14.7,14.45 16.4,16.15 16.4,23.375 17.375,24.35 v1(21.825,24.35) ; J2.4 J2.2 21.7,-33.739 23.35,-35.389 v1(23.35,-36.554)
INPUT: C3.2 S1.2 | length 29.1
  Bottom Layer w0.127: S1.2 -12,-37.469 -11.019,-38.45 C3.2
JUMPER: S1.3 S1.6 | length 5.3
  Top Layer w0.127: S1.3 S1.6
NetC2_1: C2.1 R3.1 U2.7 | length 55.8
  Top Layer w0.127: v1(-0.45,28.8) -0.425,28.825 10.075,28.825 10.425,28.475 10.425,24.525 11.129,23.821 20.354,23.821 23.571,20.604 23.571,8.321 21.575,6.325 C2.1
  Bottom Layer w0.127: R3.1 -2.835,25.55 U2.7 -0.94,25.635 -0.45,26.125 v1(-0.45,28.8)
NetC2_2: C2.2 RT1.1 | length 3.7
  Top Layer w0.127: C2.2 17.5,7.85 RT1.1
NetC3_1: C3.1 J4.2 | length 4.4
  Bottom Layer w0.127: C3.1 14.49,-39.965 J4.2
NetC4_1: C4.1 R7.1 U2.1 | length 3.1
  Bottom Layer w0.127: U2.1 4.33,26.905 R7.1 5.575,26.975 C4.1
NetC4_2: C4.2 U1.5 | length 50
  Top Layer w0.127: U1.5 -2.75,-9.725 -4.117,-8.358 -4.117,19.183 -1.833,21.467 0.992,21.467 2.912,23.387 2.912,26.362 3.7,27.15 v1(8.6,27.15)
  Bottom Layer w0.127: C4.2 v1(8.6,27.15)
NetC5_1: C5.1 U1.6 | length 1.7
  Top Layer w0.127: C5.1 -2.785,-12.4 U1.6
NetC5_2: C5.2 R1.1 U2.5 | length 36.4
  Top Layer w0.127: C5.2 -4.4,20.05 v1(-2.75,21.7)
  Bottom Layer w0.127: R1.1 -2.995,22.85 U2.5 v1(-2.75,21.7)
NetC6_2: C6.2 R6.1 | length 1.5
  Bottom Layer w0.127: C6.2 R6.1
NetC7_1: C7.1 R10.2 | length 9.1
  Top Layer w0.127: R10.2 2.2,-39.825 C7.1
NetC7_2: C7.2 R9.1 T1.1 | length 4.5
  Top Layer w0.127: C7.2 3.725,-37.8 T1.1
NetC8_2: C8.2 R8.1 | length 1.4
  Bottom Layer w0.127: C8.2 7.25,24.45 R8.1
NetD1_1: D1.1 T2.3 | length 6.9
  Top Layer w0.127: D1.1 3.98,16.27 4.825,15.425 T2.3
NetD1_2: D1.2 R12.1 | length 6.3
  Top Layer w0.127: D1.2 2.37,13.73 2.75,13.35 R12.1
NetD2_1: D2.1 S1.7 | length 43.4
  Top Layer w0.127: S1.7 -16.7,-20.65 -14.7,-18.65 -0.519,-18.65 0.775,-17.356 0.775,-14.625 0,-13.85 D2.1
NetD2_2: D2.2 R13.1 | length 6.8
  Top Layer w0.127: R13.1 -2.75,6.275 -1.895,5.42 D2.2
NetD3_1: D3.1 J7.2 J7.3 | length 15.7
  Top Layer w0.254: J7.3@0,43.6 0,41.35 1.25,40.1 4.8,40.1 4.775,40.075 4.775,34.85 4.425,34.5 D3.1
NetJ1_6: J1.6 J3.2 R4.2 | length 94.4
  Top Layer w0.127: J1.6 R4.2 -9.1,-9.575 -9.975,-10.45 -22.225,-10.45 -24.55,-12.775 -24.55,-40.1 -14.225,-50.425 5.225,-50.425 6.225,-49.425 J3.2
NetJ3_1: J3.1 J4.1 | length 3.2
  Top Layer w0.127: J3.1 J4.1
NetJ3_3: J3.3 R10.1 | length 4.6
  Top Layer w0.127: J3.3 3.685,-48.86 R10.1
NetJ4_3: J4.3 R11.2 T1.2 | length 14.8
  Top Layer w0.127: T1.2 9.525,-39.7 R11.2 9.575,-42.147 9.949,-42.522 16.447,-42.522 17.03,-43.105 J4.3
NetJ5_1: J5.1 R16.2 | length 2.2
  Top Layer w0.127: R16.2 13.55,-25 J5.1
NetJ6_1: J6.1 U3.18 | length 20.7
  Top Layer w0.127: J6.1 7.97,-20.895 6.15,-19.075 6.15,-14.041 6.845,-13.346 11.029,-13.346 11.375,-13 U3.18
NetJ6_2: J6.2 U3.19 | length 28.5
  Top Layer w0.127: J6.2 5.43,-27.605 5.75,-27.925 8.85,-27.925 9.45,-27.325 9.45,-22.016 6.404,-18.97 6.404,-14.146 6.95,-13.6 11.5,-13.6 12.025,-13.075 U3.19
NetR3_2: R3.2 R6.2 U2.6 | length 3.3
  Bottom Layer w0.127: R6.2 R3.2 -3.065,24.05 U2.6
NetR7_2: R7.2 R8.2 U2.2 | length 3.1
  Bottom Layer w0.127: U2.2 2.91,25.475 5.575,25.475 R8.2
NetR14_1: R14.1 U3.15 | length 23.5
  Top Layer w0.127: v1(6.8,6.325) 6.825,6.35 R14.1 ; v1(9.4,-9.025) 9.425,-9.05 U3.15
  Bottom Layer w0.127: v1(6.8,6.325) 6.8,3.027 6.456,2.683 6.456,-8.356 7.125,-9.025 v1(9.4,-9.025)
NetR14_2: R14.2 T2.1 | length 1.4
  Top Layer w0.127: R14.2 T2.1
NetR15_2: R15.2 X1.1 | length 2.6
  Top Layer w0.127: R15.2 X1.1
NetU3_2: U3.2 X1.3 | length 11.8
  Top Layer w0.127: U3.2 12.025,-2.3 12.45,-1.875 17.05,-1.875 17.45,-2.275 X1.3
NRST: C15.2 R19.1 S2.3 S2.4 U3.6 | length 68
  Top Layer w0.127: S2.4 S2.3 R19.1 -0.85,-33.4 1.85,-30.7 9.437,-30.7 10.975,-29.162 10.975,-20.6 12.275,-19.3 15.975,-19.3 18.125,-17.15 18.125,-15.075 16.35,-13.3 16.3,-13.3 14.325,-11.325 14.325,-9.45 13.3,-8.425 9.75,-8.425 9.425,-8.1 U3.6
OUTPUT_JACK: J2.6 R5.2 S1.5 | length 37.5
  Top Layer w0.127: S1.5 -9.2,-27.2 -4.2,-27.2 -2.225,-29.175 9.6,-29.175 10.35,-28.425 10.35,-21.125 9.05,-19.825 R5.2 9.1,-18.2 J2.6
PCB_INPUT: R2.1 S1.1 U2.3 | length 86.8
  Top Layer w0.127: S1.1 -21.55,-35.3 -23.125,-33.725 -23.125,-25.175 -18.4,-20.45 -18.4,-12.25 -17.35,-11.2 -6.575,-11.2 -4.654,-9.279 -4.654,21.246 -2.85,23.05 v1(0.225,23.05)
  Bottom Layer w0.127: v1(0.225,23.05) 0.225,23.975 0.615,24.365 U2.3 2.965,24.15 R2.1
PCB_OUTPUT: RT1.2 S1.4 | length 164.1
  Bottom Layer w0.127: S1.4 -21.075,-30 -22.525,-28.55 -22.525,-21.075 -24.375,-19.225 -24.375,5.725 -23.025,7.075 -23.025,40.15 -16.125,47.05 16.525,47.05 23.15,40.425 23.15,15.5 21.6,13.95 15.575,13.95 15,13.375 RT1.2
SPEED: RT2.2 U3.7 | length 189.6
  Top Layer w0.127: RT2.2 -15,18.5 -10.425,13.925 -10.425,10.675 -11.925,9.175 -17.95,9.175 -19.6,10.825 -19.6,12.65 -16.875,15.375 -16.875,21.95 -18.6,23.675 -23.6,23.675 -25,25.075 -25,39.634 -15.755,48.879 15.921,48.879 24.333,40.467 24.333,7.065 19.76,2.492 4.692,2.492 4.108,1.908 4.108,-1.79 4.843,-2.525 7.9,-2.525 8.775,-3.4 U3.7
SPI_C\S\: U1.1 U3.13 | length 7.8
  Top Layer w0.127: U1.1 4.22,-14.905 6.275,-12.85 7.5,-12.85 8.125,-12.225 U3.13
SPI_SCK: U1.2 U3.12 | length 10.5
  Top Layer w0.127: U1.2 4.29,-13.635 4.7,-13.225 4.7,-9.5 5.175,-9.025 7.275,-9.025 7.475,-9.225 U3.12
SPI_SI: U1.3 U3.14 | length 17.7
  Top Layer w0.127: U1.3 1.465,-12.365 0.575,-11.475 0.575,-8.55 2.1,-7.025 8,-7.025 8.775,-7.8 U3.14
SWITCH: RT4.2 U3.9 | length 59.9
  Top Layer w0.127: U3.9 7.475,-3.825 6.95,-3.3 4.9,-3.3 3.6,-2 3.6,2.118 4.482,3 19.55,3 23.825,7.275 23.825,20.575 23.825,20.709 20.459,24.075 20.325,24.075 16,24.075 15.05,25.025 15.05,28.45 RT4.2
TAP_TEMPO: R16.1 U3.11 | length 20.8
  Top Layer w0.127: v1(5.65,-10.875) U3.11 ; v1(11.95,-21.25) 11.95,-24.95 R16.1
  Bottom Layer w0.127: v1(5.65,-10.875) 10.425,-10.875 11.95,-12.4 v1(11.95,-21.25)
pads on no net: J1.3 J1.5 J1.7 J2.3 J2.5 J2.7 RT1. RT2. RT3. RT4. S1.9 U3.1 U3.3 U3.10 U3.16 U3.17 U3.20 U4.

## Polygon pours and split planes (outlines as drawn)
DGND on Bottom Layer "NONET_L-01_P-001" (solid, pour order 0): -26,-51.5 26,-51.5 26,51.5 -26,51.5
DGND on Top Layer "NONET_L-01_P-001" (solid, pour order 1): -26,-51.5 26,-51.5 26,51.5 -26,51.5

## Silkscreen, mask and mechanical layers (free items; w line width, h text height)
Bottom Overlay:
  text "Liquid Tremolo" at -1.254,-43.738 h1.52
  text "MK 31.08.2021" at -0.754,-46.246 h1.52
  text "1590B Case" at -3.754,-48.246 h1.52
Outline:
  the board outline again, w0.05

## Text inside footprints (layer, text, board x,y; h text height)
J3: Top Overlay "1" at 9.511,-41.554 h1.52 r180; Top Overlay "2" at 6.971,-41.554 h1.52 r180; Top Overlay "3" at 4.431,-41.554 h1.52 r180
J4: Top Overlay "1" at 11.204,-47.046 h1.52; Top Overlay "2" at 13.744,-47.046 h1.52; Top Overlay "3" at 16.284,-47.046 h1.52
J5: Top Overlay "1" at 14.984,-27.746 h1.52; Top Overlay "2" at 17.524,-27.746 h1.52
J6: Top Overlay "CLK" at 7.535,-20.855 h1.2 r270; Top Overlay "DIO" at 4.995,-20.855 h1.2 r270; Top Overlay "GND" at 2.455,-20.855 h1.2 r270; Top Overlay "VCC" at -0.085,-20.855 h1.2 r270